# Altium PCB switchcard_powered.PcbDoc
Units mm, origin at the board's own origin, x right, y up, seen from the top; angles counter-clockwise.
Board outline 152.4 x 101.6 mm, 2 copper layers (Top Layer, Bottom Layer); 25 components, 58 nets, 124 pads, 9 vias.
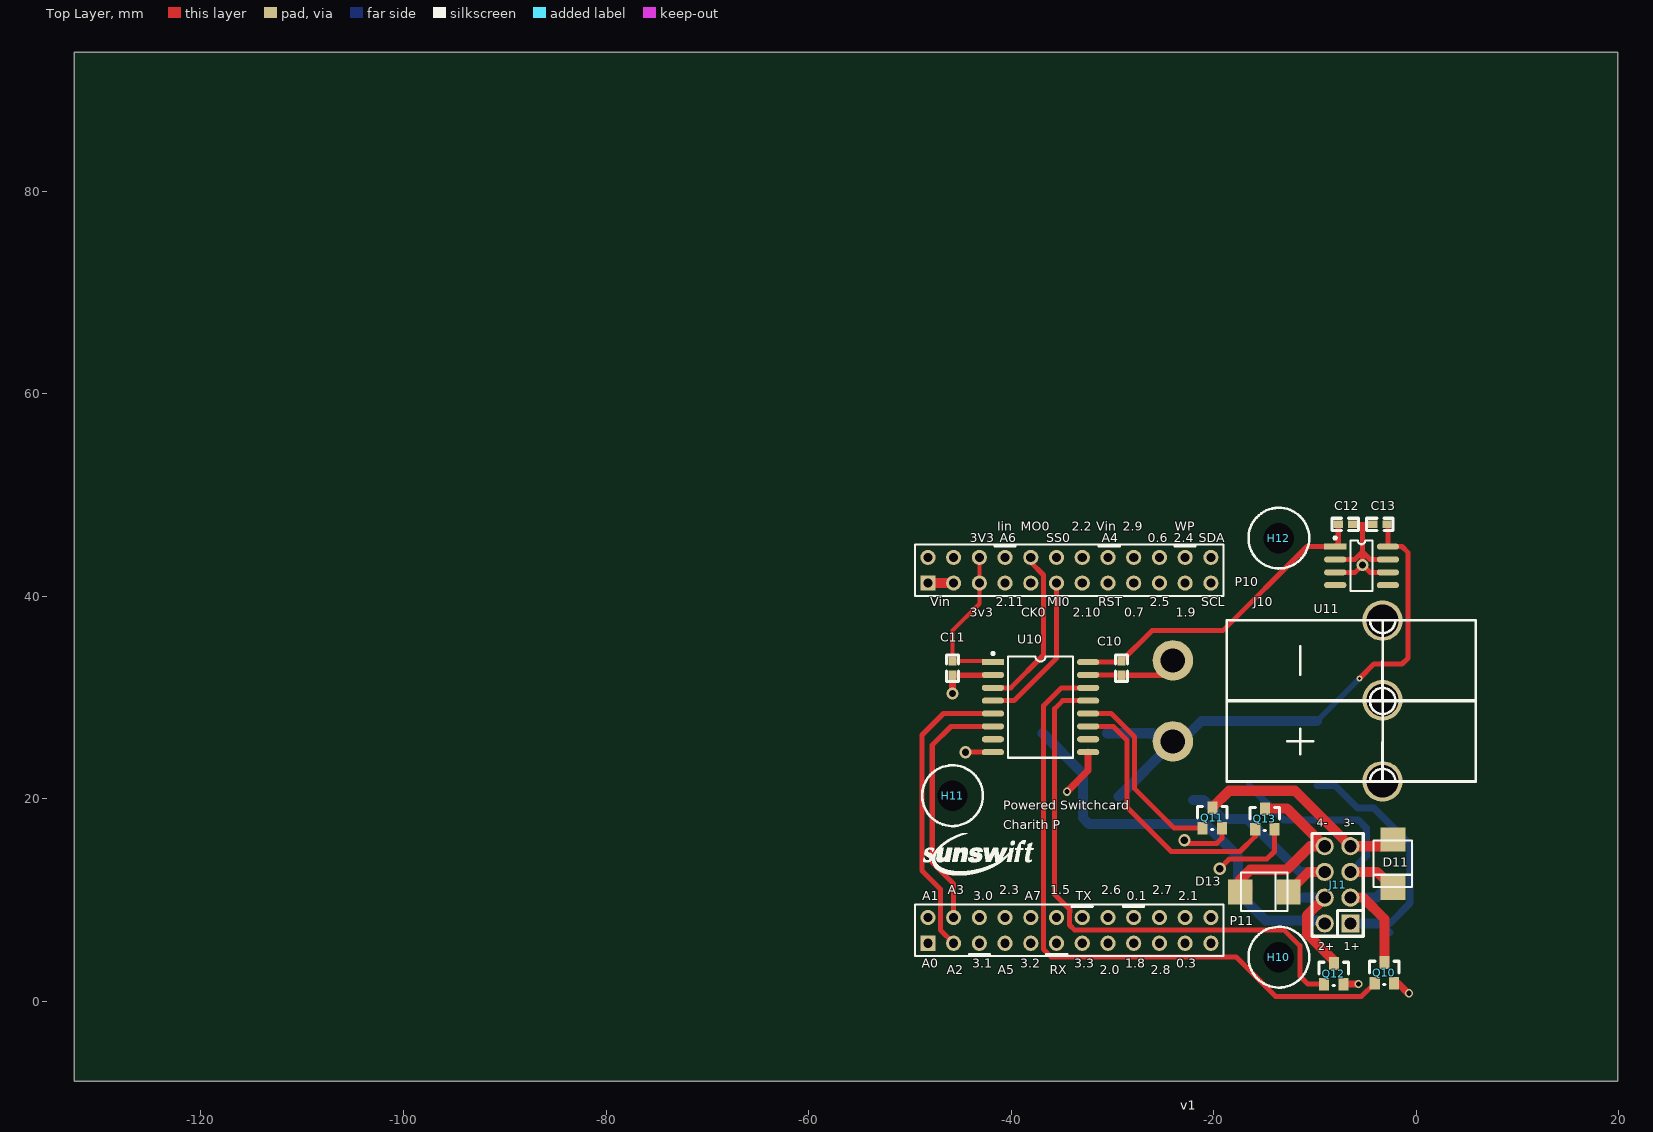
[diagram p0: Top Layer view]
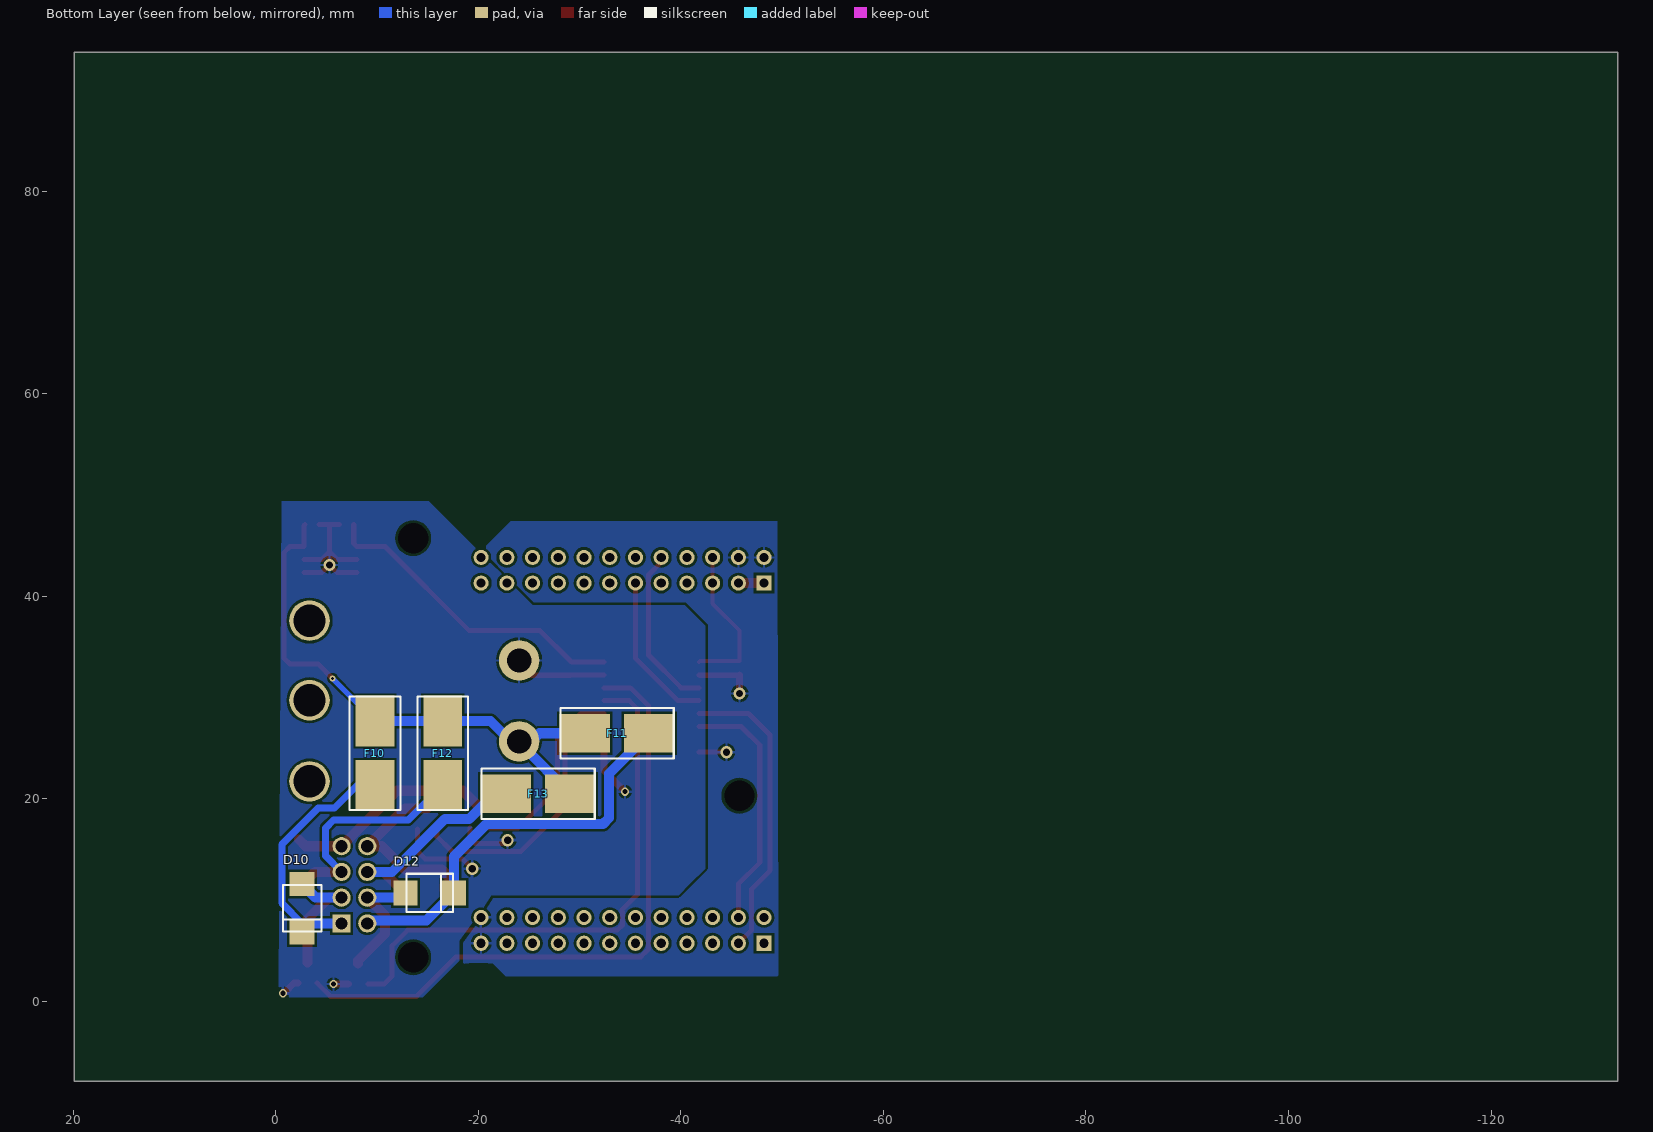
[diagram p1: Bottom Layer view, seen from below]

## Layer stack, top to bottom
Top Layer: signal copper 0.0356
Dielectric: dielectric 0.32, FR-4, Dk 4.8
Bottom Layer: signal copper 0.0356

## Board outline
-132.508,-7.888 19.892,-7.888 19.892,93.712 -132.508,93.712

## Design rules (kind name [scope] priority, off if disabled: settings)
Clearance [All] p1: gap=0.254
ComponentClearance [All] p1 off: gap=0.254 collisioncheckmode=3 verticalgap=0.254 showdistances=FALSE
PolygonConnect [All] p1: connectstyle=Relief reliefconductorwidth=0.254 reliefentries=4 polygonreliefangle="90 Angle"
RoutingVias [All] p1: holewidth=0.711 width=1.27 viastyle="Through Hole" minholewidth=0.3 minwidth=0.6 maxholewidth=0.711 maxwidth=1.27
SilkscreenOverComponentPads [All] p1 off: minsilkscreentomaskgap=0.254
SolderMaskExpansion [All] p1: expansion=0.102
Width [All] p1: maxlimit=2 minlimit=0.2 preferedwidth=0.3
26 further rules are at their usual default settings.

## Components (designator, comment, footprint, x,y, rotation, side; value= is the part's Value field where it differs from the comment)
C10 "100nF" 0603 -29.1,33.6 r270 top
C11 "100nF" 0603 -45.8,33.6 r270 top
C12 "100nF" 0603 -7.7,47.1 r0 top
C13 "100nF" 0603 -2.9,47.1 r180 top
D10 "D SCHOTTKY" SMB -2.6,9.2 r270 bottom
D11 "D SCHOTTKY" SMB -2.3,13.6 r270 top
D12 "D SCHOTTKY" SMB -15.2,10.7 r180 bottom
D13 "D SCHOTTKY" SMB -15,10.8 r0 top
F10 "FUSE" LITTELFUSE-154 -9.8,24.5 r270 bottom
F11 "FUSE" LITTELFUSE-154 -33.7,26.467 r180 bottom
F12 "FUSE" LITTELFUSE-154 -16.5,24.5 r270 bottom
F13 "FUSE" LITTELFUSE-154 -25.9,20.5 r0 bottom
H10 "HOLE" M2.5 -13.564,4.359 r0 top locked
H11 "HOLE" M2.5 -45.79,20.309 r0 top locked
H12 "HOLE" M2.5 -13.564,45.739 r0 top locked
J10 "Mini PowerPole" POWERPOLE25A-2 -18.7,37.6 r270 top
J11 "CON8" JST_SolderHoles -6.5,7.7 r90 top
P10 "Header 12X2A" HDR2X12_CEN -48.22,41.299 r0 top locked
P11 "Header 12X2A" HDR2X12_CEN -48.22,5.739 r0 top locked
Q10 "IRLML6344TRPBF" SOT23-3 -4.1,1.8 r0 top
Q11 "IRLML6344TRPBF" SOT23-3 -21.1,17.1 r0 top
Q12 "IRLML6344TRPBF" SOT23-3 -9.1,1.7 r0 top
Q13 "IRLML6344TRPBF" SOT23-3 -15.9,17 r0 top
U10 "Si844x" "SO16 (Wide)" -41.8,33.5 r270 top
U11 "78Lxx" "78Lxx SO8" -5.4,43 r270 top

## Footprints (in the part's own frame and the unit in brackets; to place one, negate y for a bottom-side part, rotate by r counter-clockwise, add the part's x,y. Pads: shape width x height; smd on the part's side, far side on the other; paste and mask are expansions set on the pad)
"78Lxx SO8" [mm]
  oval 0.6x2.2 smd: COMMON(-0.635,2.6) COMMON(-0.635,-2.6) COMMON(0.635,2.6) COMMON(0.635,-2.6) INPUT(-1.905,2.6) NC(1.905,2.6) NC(1.905,-2.6)
  rect 0.6x2.2 smd: OUTPUT(-1.905,-2.6)
  silkscreen extent -2.88,-2.72 2.5,1.1
0603 [mil]
  rect 35.43x30 smd: 1(0,0) 2(55,0)
  silkscreen extent -24,-24 79,24
HDR2X12_CEN [mm] "Connector; Header; 12x2 Position"
  rect 1.5x1.5 hole 0.9: 1(0,0)
  round 1.5 hole 0.9: 2(2.54,0) 3(5.08,0) 4(7.62,0) 5(10.16,0) 6(12.7,0) 7(15.24,0) 8(17.78,0) 9(20.32,0) 10(22.86,0) 11(25.4,0) 12(27.94,0) 13(0,2.54) 14(2.54,2.54) 15(5.08,2.54) 16(7.62,2.54) 17(10.16,2.54) 18(12.7,2.54) 19(15.24,2.54) 20(17.78,2.54) 21(20.32,2.54) 22(22.86,2.54) 23(25.4,2.54) 24(27.94,2.54)
  silkscreen extent -1.27,-1.27 29.21,3.81
JST_SolderHoles [mm]
  rect 1.8x1.8 hole 1.2: 1(0,0)
  round 1.8 hole 1.2: 2(2.54,0) 3(0,2.54) 4(2.54,2.54) 5(5.08,0) 6(7.62,0) 7(5.08,2.54) 8(7.62,2.54)
  silkscreen extent -1.27,-1.27 8.89,3.81
LITTELFUSE-154 [mm]
  rect 5x3.81 smd: 1(-3.185,0) 2(3.185,0)
  silkscreen extent -5.6,-2.51 5.6,2.5
M2.5 [mm]
  round 0 hole 3: 1(0,0)
  silkscreen extent -3,-3 3,3
POWERPOLE25A-2 [mm]
  round 4 hole 3.2: 0(0,15.367) 0(7.874,15.367) 0(15.875,15.367)
  round 4 hole 2.4: NEG(3.937,-5.334) POS(11.938,-5.334)
  silkscreen extent -0.01,-0.02 15.89,24.58
SMB [mm]
  rect 2.4x2.5 smd: A(-2.385,0) K(2.385,0)
  silkscreen extent -2.28,-1.9 2.3,1.9
"SO16 (Wide)" [mm]
  rect 0.6x2.2 smd: 1(0,0)
  oval 0.6x2.2 smd: 2(1.27,0) 3(2.54,0) 4(3.81,0) 5(5.08,0) 6(6.35,0) 7(7.62,0) 8(8.89,0) 9(8.89,9.4) 10(7.62,9.4) 11(6.35,9.4) 12(5.08,9.4) 13(3.81,9.4) 14(2.54,9.4) 15(1.27,9.4) 16(0,9.4)
  silkscreen extent -0.97,-0.12 9.44,7.9
SOT23-3 [mm]
  rect 1x1.25 smd: 1(0,0) 2(1.905,0) 3(0.965,2.032)
  silkscreen extent -0.51,-0.13 2.41,2.16

## Part data
C10 C11 C12 C13: library part CAP, "Capacitor"
D10 D11 D12 D13: "Schottky Diode"
F10 F11 F12 F13: "Fuse"
H10 H11 H12: "Hole"
J10: library part PowerPole
J11: "8 Pin 3.5mm Screw Terminal  header"
P10 P11: "Header, 12-Pin, Dual row"
Q10 Q11 Q12 Q13: library part ZXM61N02F, "5A, 30V N-Channel Enhancement mode FET"
U10: "Si844x High Speed Digital Isolator"
U11: library part "78Lxx SOIC LDO"

## Via types
v1: diameter 1.2, hole 0.711, Top Layer to Bottom Layer, 4 vias
v2: diameter 0.8, hole 0.5, Top Layer to Bottom Layer, 3 vias
v3: diameter 1.2, hole 0.7, Top Layer to Bottom Layer, 1 vias
v4: diameter 0.6, hole 0.3, Top Layer to Bottom Layer, 1 vias

## Nets (pads, with @x,y where several pads share a name; then routed paths per layer and width w, separated by ;. In a path a pad name is that pad's centre, name@x,y a point inside that pad or via, vN(x,y) a via of type N, cw(c..) or ccw(c..) an arc to the next point about the centre after c; other vN are vias at no path point)
3V3: C11.1 P10.3 P10.15 U10.1 | length 15.4
  Top Layer w0.4: P10.15 P10.3 -43.14,39.26 -45.8,36.6 C11.1 -41.9,33.6 U10.1
DRIVE_CH1: Q10.1 U10.14 | length 64.3
  Top Layer w0.5: U10.14 -35.04,30.96 -36.8,29.2 -36.8,5.151 -36.049,4.4 -17.8,4.4 -13.9,0.5 -5.4,0.5 Q10.1
DRIVE_CH2: Q12.1 U10.13 | length 54.9
  Top Layer w0.5: U10.13 -34.91,29.69 -35.7,28.9 -35.7,10.549 -34.21,9.059 -34.21,8.822 -34.234,8.798 -34.234,7.534 -33.725,7.025 -13.025,7.025 -11.5,5.5 -11.5,2.5 -10.7,1.7 Q12.1
DRIVE_CH3: Q11.1 U10.12 | length 19
  Top Layer w0.5: U10.12 -30.12,28.42 -27.8,26.1 -27.8,21 -23.9,17.1 Q11.1
DRIVE_CH4: Q13.1 U10.11 | length 26.8
  Top Layer w0.5: U10.11 -29.916,27.15 -28.554,25.788 -28.554,19.154 -24.2,14.8 -17.4,14.8 -15.9,16.3 Q13.1
EEPROM_WP: P10.23
EXT_5V: C10.1 C12.1 U10.16 U11.OUTPUT | length 31.4
  Top Layer w0.5: U10.16 -29.2,33.5 C10.1 -26.1,36.6 -19.1,36.6 -10.795,44.905 U11.OUTPUT -7.7,45.205 C12.1
EXT_12V: C13.1 F10.1 F11.1 F12.1 F13.1 J10.POS U11.INPUT | length 56.2
  Top Layer w0.5: v4(-5.6,31.885) -4.185,33.3 -1.4,33.3 -0.8,33.9 -0.8,44.3 -1.405,44.905 U11.INPUT -2.8,47 C13.1
  Bottom Layer w0.5: F10.1 v4(-5.6,31.885)
  Bottom Layer w1: F11.1 -26.039,26.467 J10.POS@-24.234,24.662 ; F13.1@-29.385,20.215 -23.986,25.614 -23.282,25.614 -21.211,27.685 F12.1 F10.1
EXT_GND: C10.2 C12.2 C13.2 J10.NEG Q10.2 Q11.2 Q12.2 Q13.2 U10.9 U10.15 U11.COMMON | length 47.5
  Top Layer w0.5: U10.15 -29.127,32.23 C10.2 -24.694,32.203 J10.NEG@-24.234,32.663 ; v1(-22.9,15.904) -22.596,15.6 -19.7,15.6 -19.195,16.105 Q11.2 ; v1(-19.4,13.1) -18.454,14.046 -14.754,14.046 -13.995,14.805 Q13.2 ; U11.COMMON@-8,42.365 -6.035,42.365 v1(-5.3,43.1) ; U11.COMMON@-8,43.635 -6.065,43.635 -5.3,44.4 ; C12.2 -5.3,47.1 ; C13.2 -5.3,47.1 ; U11.COMMON@-2.8,42.365 -4.565,42.365 v1(-5.3,43.1) ; U11.COMMON@-2.8,43.635 -4.535,43.635 -5.3,44.4 ; v1(-5.3,43.1) -5.3,44.4 ; -5.3,44.4 -5.3,47.1
  Top Layer w0.7: v2(-34.5,20.7) -32.4,22.8 U10.9 ; Q12.2 v2(-5.7,1.7) ; Q10.2 -1.8,1.8 -0.8,0.8 v2(-0.7,0.8)
GND: C11.2 P10.13 P10.14 P11.12 P11.24 U10.2 U10.8 | length 8.5
  Top Layer w0.5: C11.2 -41.827,32.203 U10.2 ; v1(-44.5,24.6) -41.81,24.6 U10.8
  Top Layer w0.7: v3(-45.8,30.4) C11.2
INPUT_CH1: P10.17 U10.3 | length 16.5
  Top Layer w0.5: U10.3 -40.04,30.96 -36.806,34.194 -36.806,42.106 -38.06,43.36 P10.17
INPUT_CH2: P10.6 U10.4 | length 15.4
  Top Layer w0.5: U10.4 -39.71,29.69 -35.52,33.88 P10.6
INPUT_CH3: P11.2 U10.5 | length 29.7
  Top Layer w0.5: P11.2 -46.966,7.025 -46.966,11.066 -48.8,12.9 -48.8,26.3 -46.68,28.42 U10.5
INPUT_CH4: P11.14 U10.6 | length 24.7
  Top Layer w0.5: P11.14 -45.68,11.58 -47.794,13.694 -47.794,25.306 -45.95,27.15 U10.6
"PIO 0.1/CLKOUT": P11.21
"PIO 0.2/SSEL0": P10.18
"PIO 0.3": P11.11
"PIO 0.4/SCL": P10.12
"PIO 0.5/SDA": P10.24
"PIO 0.6": P10.22
"PIO 0.7": P10.9
"PIO 0.10/SCK0": P10.5
"PIO 0.11/ADC0": P11.1
"PIO 1.0/ADC1": P11.13
"PIO 1.3/ADC4": P10.20
"PIO 1.4/ADC5/WAKEUP": P11.4
"PIO 1.5": P11.18
"PIO 1.6/RX": P11.6
"PIO 1.7/TX": P11.19
"PIO 1.8": P11.9
"PIO 1.9": P10.11
"PIO 1.10/ADC6": P10.16
"PIO 1.11/ADC7": P11.17
"PIO 2.0/SSEL1": P11.8
"PIO 2.1/SCK1": P11.23
"PIO 2.2/MISO1": P10.19
"PIO 2.3/MOSI1": P11.16
"PIO 2.5": P10.10
"PIO 2.6": P11.20
"PIO 2.7": P11.22
"PIO 2.8": P11.10
"PIO 2.9": P10.21
"PIO 2.10": P10.7
"PIO 2.11": P10.4
"PIO 3.0": P11.15
"PIO 3.1": P11.3
"PIO 3.2": P11.5
"PIO 3.3": P11.7
R\E\S\E\T\: P10.8
RETURN_CH1: D10.A J11.2 Q10.3 | length 13
  Top Layer w1: J11.2 -5.24,10.24 -3.135,8.135 Q10.3
  Bottom Layer w1: J11.2 -3.945,10.24 D10.A
RETURN_CH2: D12.A J11.4 Q12.3 | length 12.3
  Top Layer w1: J11.4 -10.8,8.48 -10.8,6.7 -8.135,4.035 Q12.3
  Bottom Layer w1: D12.A -12.355,10.24 J11.4
RETURN_CH3: D11.A J11.6 Q11.3 | length 21.1
  Top Layer w1: Q11.3 -18.467,20.8 -11.98,20.8 J11.6 -2.965,15.32 D11.A
RETURN_CH4: D13.A J11.8 Q13.3 | length 18.8
  Top Layer w1: D13.A -17.385,12.015 -16.4,13 -12.8,13 -10.48,15.32 J11.8 -12.752,19.032 Q13.3 ; D13.A@-16.685,11 D13.A@-16.685,11.415
SW_CH1: D10.K F10.2 J11.1 | length 24.5
  Bottom Layer w0.7: F10.2 -8.015,21.315 -5.8,19.1 -4.2,19.1 -0.6,15.5 -0.6,9.7 D10.K@-2.6,7.7 ; D10.K@-3.485,7.7 D10.K
  Bottom Layer w1: J11.1 D10.K@-3.485,7.7
SW_CH2: D12.K F11.2 J11.3 | length 40.3
  Bottom Layer w1: F11.2 -32.9,22.482 -32.9,18.1 -32.3,17.5 -20.8,17.5 -17.585,14.285 D12.K -14.885,8 -9.34,8 J11.3
SW_CH3: D11.K F12.2 J11.5 | length 23.2
  Top Layer w1: J11.5 -3.865,12.78 D11.K
  Bottom Layer w0.7: F12.2 -13.085,17.9 -5.7,17.9 -4.9,17.1 -4.9,14.38 J11.5
SW_CH4: D13.K F13.2 J11.7 | length 20.3
  Top Layer w1: D13.K -10.635,12.78 J11.7
  Bottom Layer w1: F13.2@-22.015,19.9 -21,19.9 -19.1,18 -16.696,18 -11.476,12.78 J11.7
VIN: P10.1 P10.2 | length 2.5
  Top Layer w1: P10.1 P10.2
pads on no net: H10.1 H11.1 H12.1 J10.0 U10.7 U10.10 U11.NC

## Polygon pours and split planes (outlines as drawn)
EXT_GND on Bottom Layer "EXT_GNDPlane" (solid, pour order 2): -0.6,49.4 -15.1,49.4 -25.4,39.1 -40.4,39.1 -42.4,37.1 -42.4,13.1 -39.8,10.5 -21.3,10.5 -20.1,8.7 -18.1,6 -18.1,4 -14.5,0.4 -0.3,0.4
GND on Bottom Layer "GNDPlane" (solid, pour order 4): -49.5,47.4 -23.2,47.4 -20.8,45 -20.8,44.1 -25.5,39.4 -40.5,39.4 -42.7,37.2 -42.7,13.1 -39.8,10.2 -21.5,10.2 -21,9.4 -20.1,7.9 -18.5,5.8 -18.5,3.7 -19.5,3.8 -20.5,3.8 -21.5,3.7 -22.7,2.5 -49.6,2.5

## Silkscreen, mask and mechanical layers (free items; w line width, h text height)
Top Overlay:
  drawing of 1666 lines, arcs and shapes, not listed
  text "Iin" at -41.357,46.46 h0.9
  text "MO0" at -39.051,46.46 h0.9
  text "2.2" at -34.028,46.46 h0.9
  text "Vin" at -31.578,46.46 h0.9
  text "2.9" at -29.004,46.46 h0.9
  text "WP" at -23.831,46.46 h0.9
  text "3V3" at -44.075,45.317 h0.9
  text "A6" at -41.103,45.317 h0.9
  text "SS0" at -36.539,45.317 h0.9
  text "A4" at -31.07,45.317 h0.9
  text "0.6" at -26.492,45.317 h0.9
  text "2.4" at -23.958,45.317 h0.9
  text "SDA" at -21.469,45.317 h0.9
  text "Vin" at -48.012,38.992 h0.9
  text "2.11" at -41.539,38.992 h0.9
  text "MI0" at -36.458,38.992 h0.9
  text "RST" at -31.377,38.992 h0.9
  text "2.5" at -26.296,38.992 h0.9
  text "SCL" at -21.215,38.992 h0.9
  text "3v3" at -44.08,37.993 h0.9
  text "CK0" at -38.999,37.993 h0.9
  text "2.10" at -33.918,37.993 h0.9
  text "0.7" at -28.836,37.993 h0.9
  text "1.9" at -23.755,37.993 h0.9
  text "Powered Switchcard" at -40.8,18.9 h0.9
  text "Charith P" at -40.8,17 h0.9
  text "A3" at -46.245,10.584 h0.9
  text "2.3" at -41.196,10.584 h0.9
  text "1.5" at -36.147,10.584 h0.9
  text "2.6" at -31.097,10.584 h0.9
  text "2.7" at -26.048,10.584 h0.9
  text "A1" at -48.77,10.005 h0.9
  text "3.0" at -43.721,10.005 h0.9
  text "A7" at -38.671,10.005 h0.9
  text "TX" at -33.622,10.005 h0.9
  text "0.1" at -28.572,10.005 h0.9
  text "2.1" at -23.523,10.005 h0.9
  text "A0" at -48.85,3.322 h0.9
  text "3.1" at -43.821,3.322 h0.9
  text "3.2" at -39.092,3.322 h0.9
  text "3.3" at -33.762,3.322 h0.9
  text "1.8" at -28.733,3.322 h0.9
  text "0.3" at -23.704,3.322 h0.9
  text "A2" at -46.335,2.687 h0.9
  text "A5" at -41.306,2.687 h0.9
  text "RX" at -36.177,2.687 h0.9
  text "2.0" at -31.248,2.687 h0.9
  text "2.8" at -26.219,2.687 h0.9
  text "v1" at -23.3,-10.7 h0.9
Mechanical 1:
  lines w0.2: -22.8,47.899 -50,47.899 -50,2.099 -22.5,2.099 cw(c-19.811,0.16) -16.5,0.005 ; -22.799,47.9 ccw(c-20.11,49.839) -16.799,49.994 ; -16.805,49.999 0,49.999 0,0 -16.505,0

## Text inside footprints (layer, text, board x,y; h text height)
J11: Top Overlay "2+" at -9.675,5.033 h0.8; Top Overlay "4-" at -9.802,17.225 h0.8; Top Overlay "3-" at -7.135,17.225 h0.8; Top Overlay "1+" at -7.135,5.033 h0.8